# Altium PCB manually_routing_header.PcbDoc
Units mil, origin at the board's own origin, x right, y up, seen from the top; angles counter-clockwise.
Board outline 2290 x 2230 mil, 2 copper layers (Top Layer, Bottom Layer); 9 components, 28 nets, 111 pads, 18 vias.
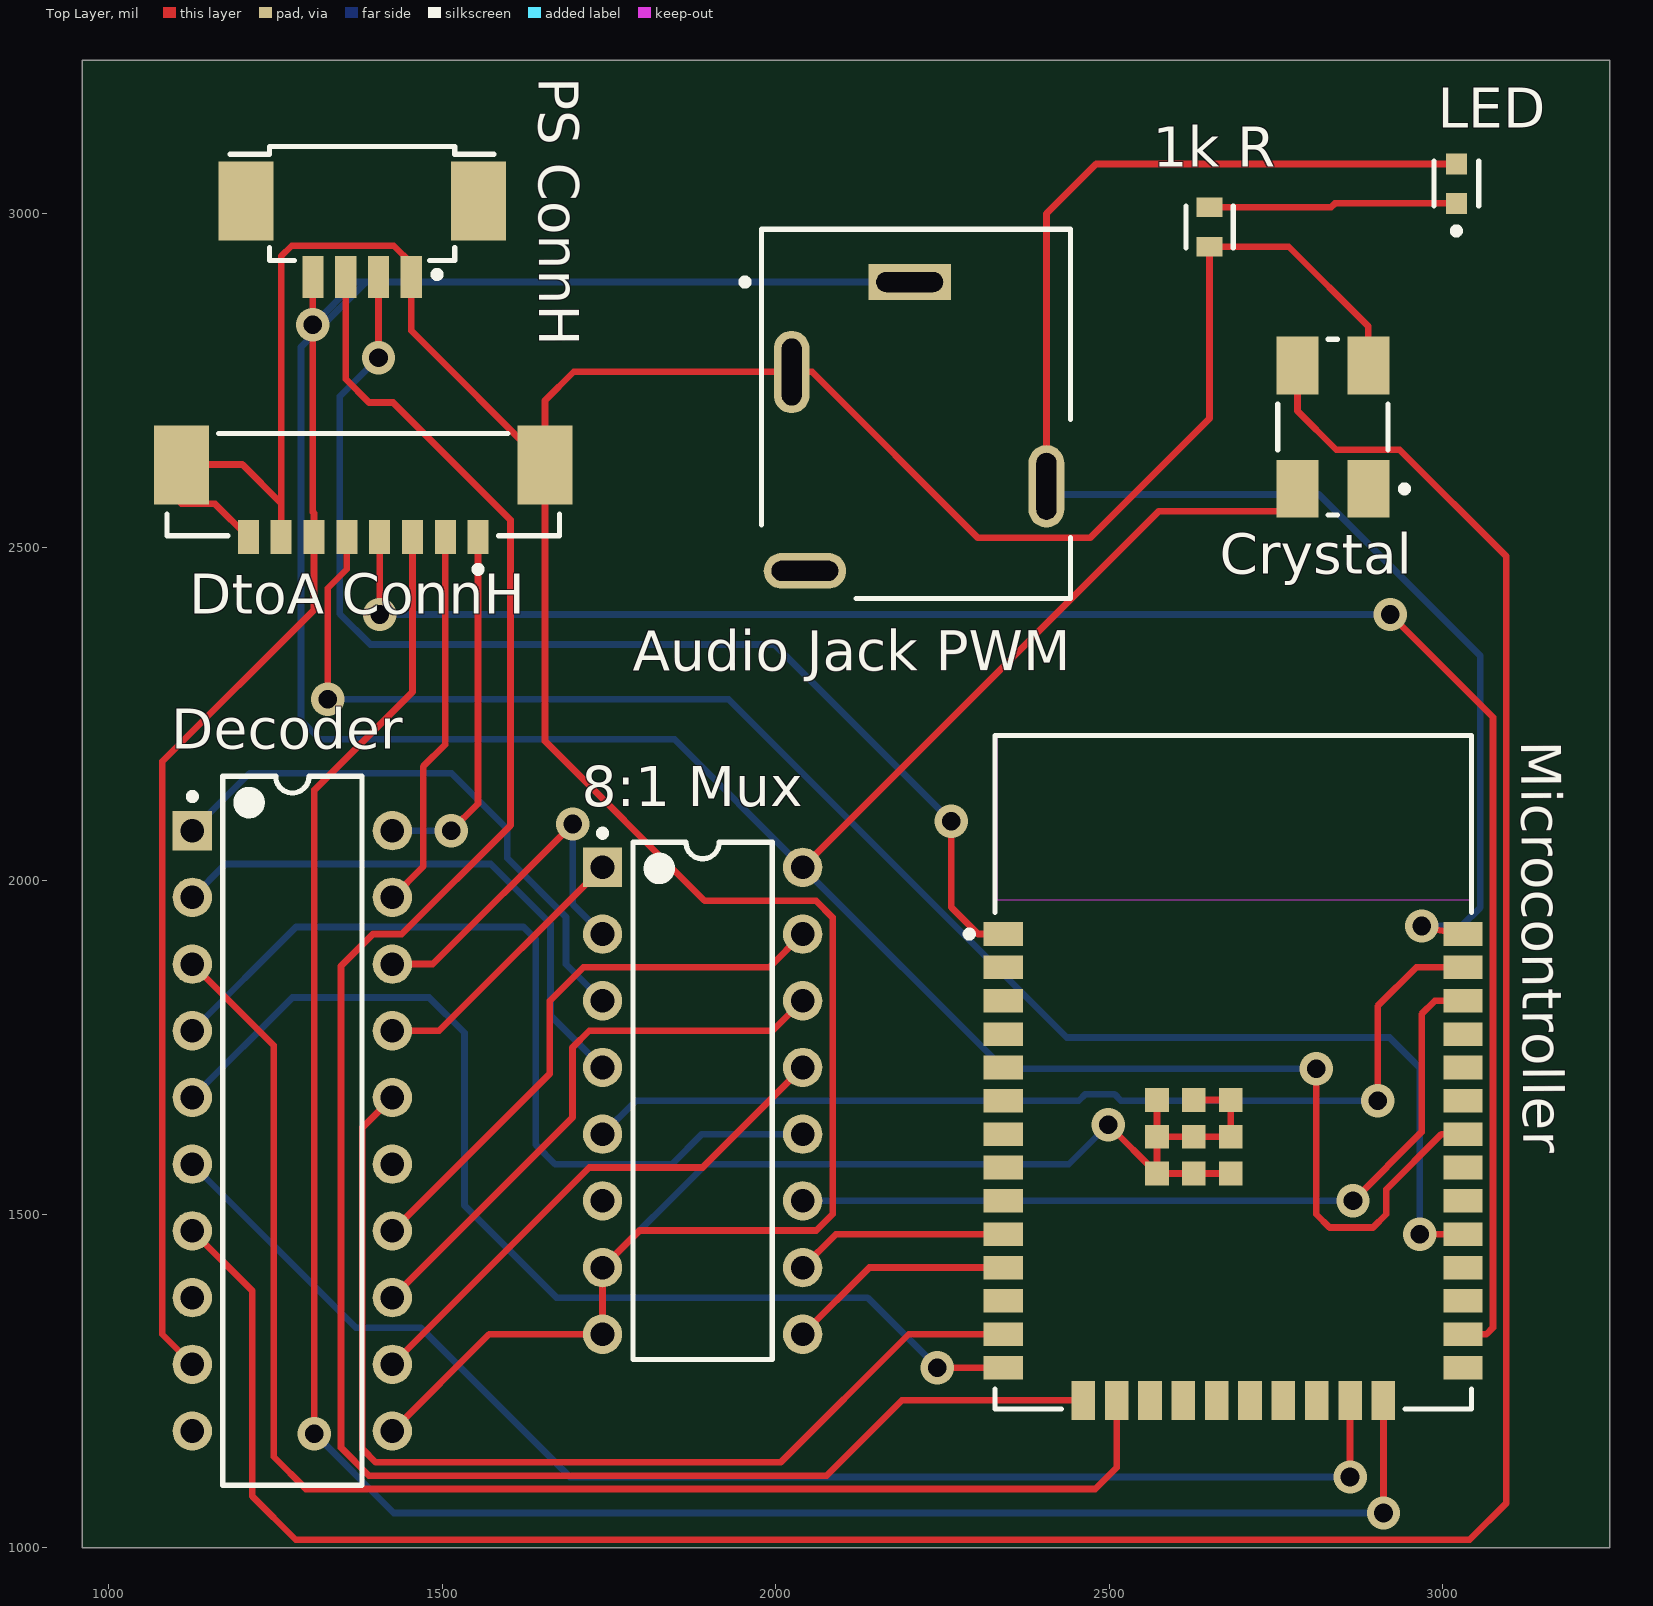
[diagram p0: Top Layer view]
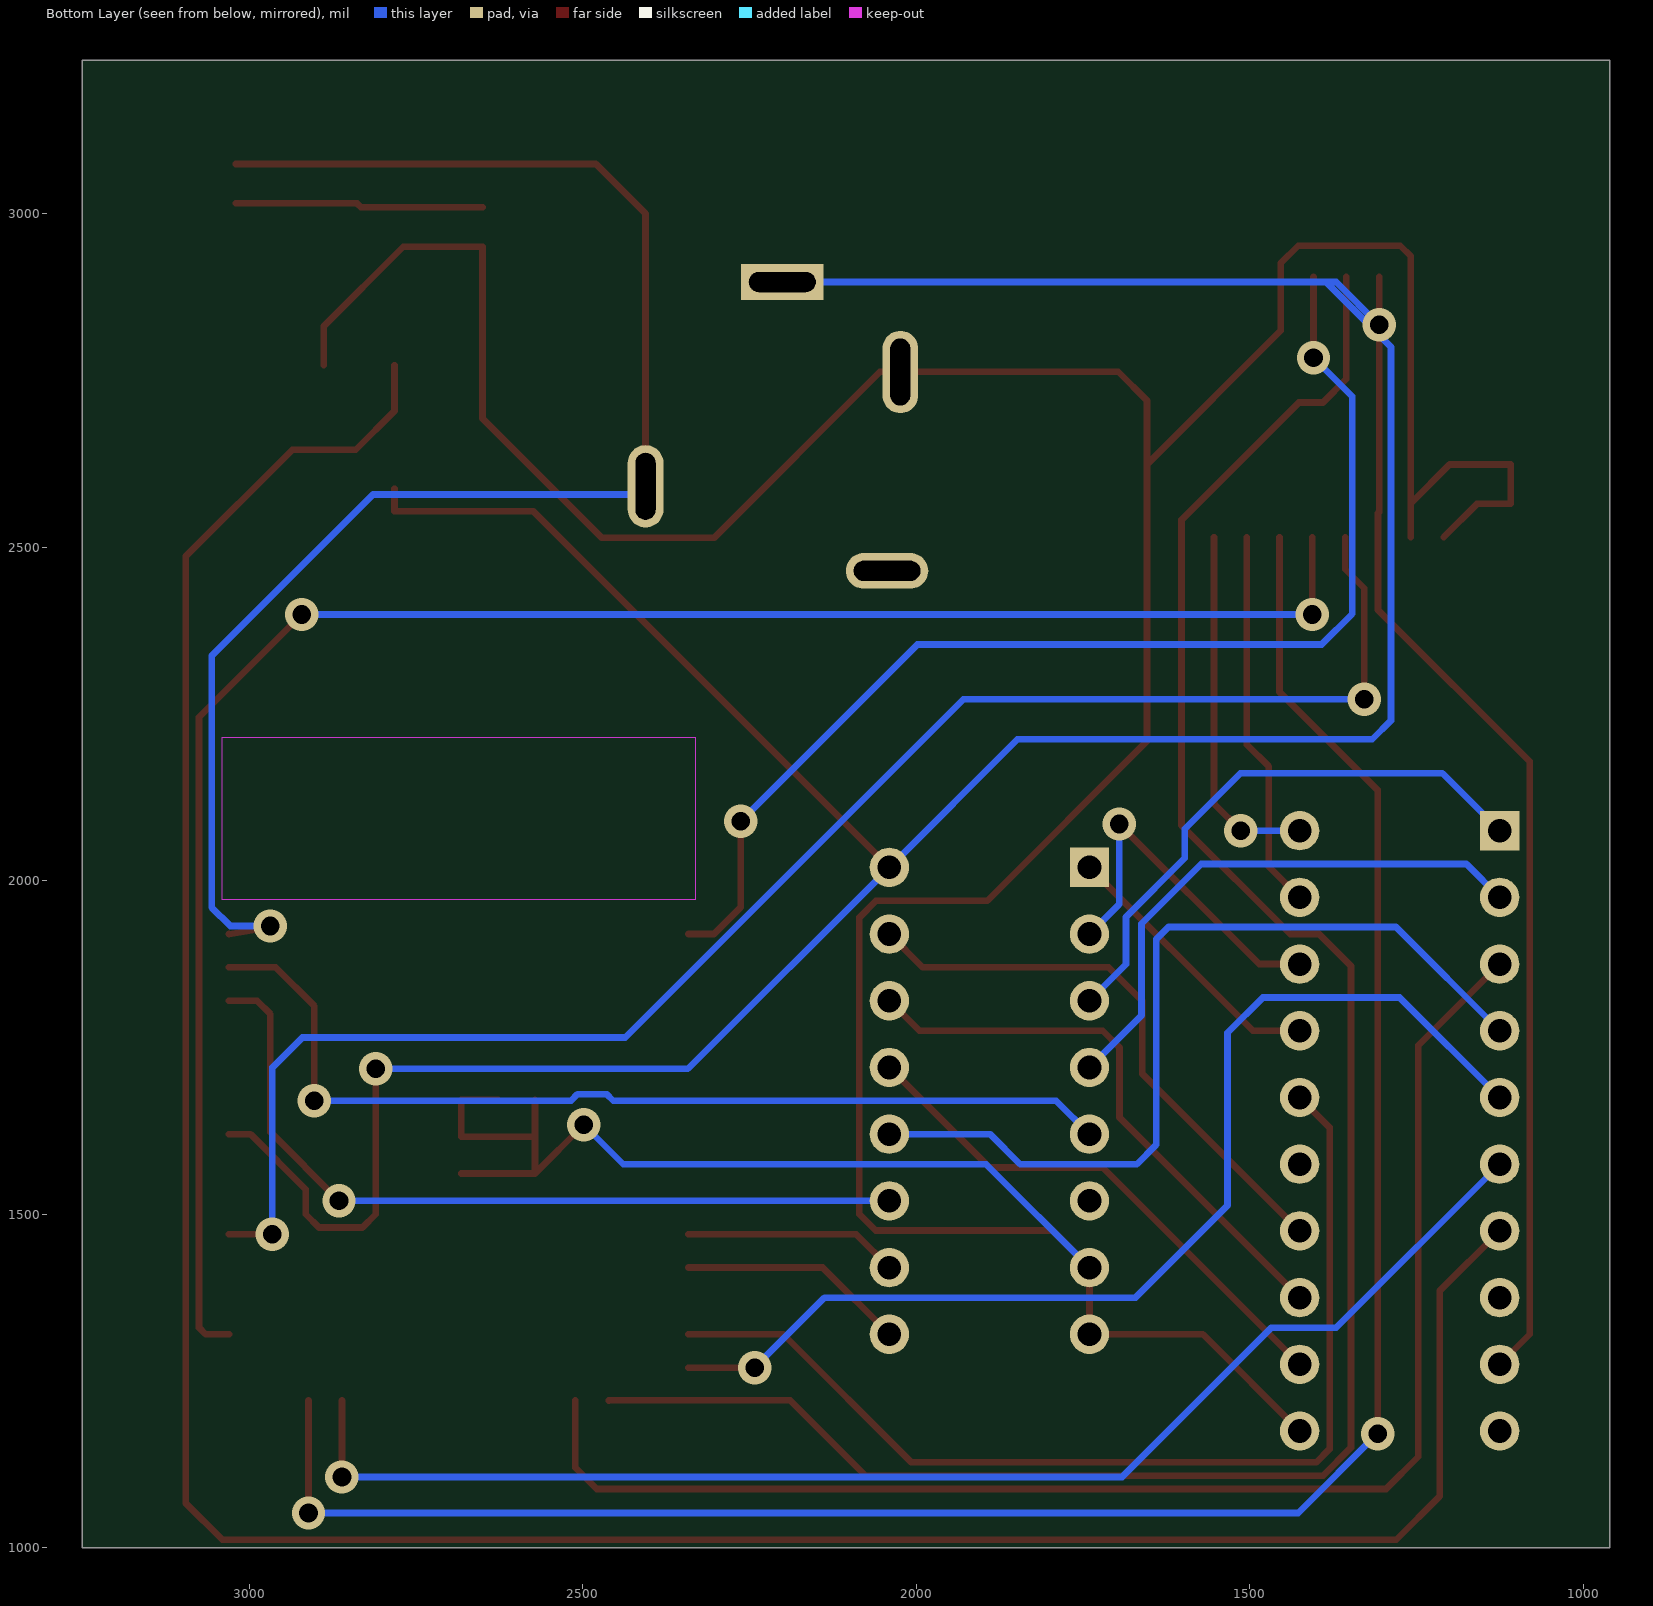
[diagram p1: Bottom Layer view, seen from below]
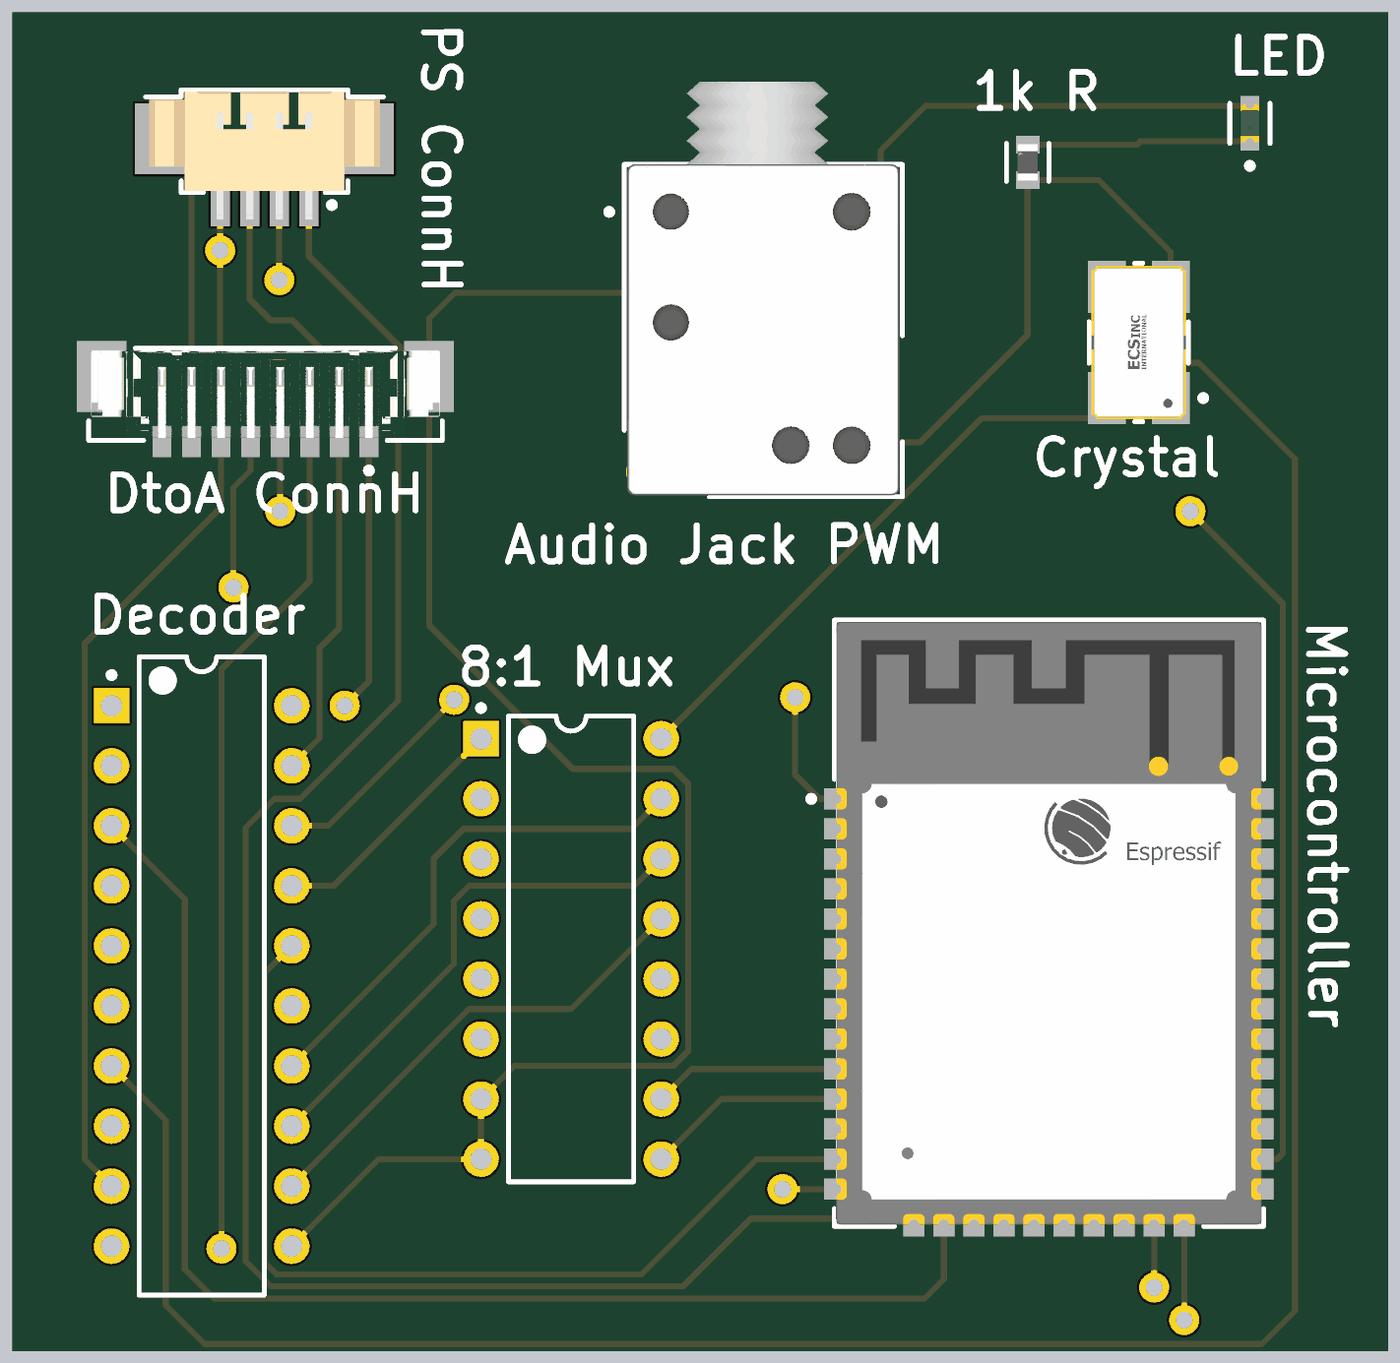
[diagram p2: 3D render of the assembled board from above, using the file's embedded part models]

## Layer stack, top to bottom
Top Solder: solder mask 0.4, Solder Resist, Dk 3.5
Top Layer: signal copper 1.4
Dielectric 1: dielectric 12.6, FR-4, Dk 4.8
Bottom Layer: signal copper 1.4
Bottom Solder: solder mask 0.4, Solder Resist, Dk 3.5

## Board outline
960,1000 3250,1000 3250,3230 960,3230

## Design rules (kind name [scope] priority, off if disabled: settings)
Clearance [All] p1: gap=10 ignorepadtopadclearanceinfootprint=FALSE except(0: Arc-Hole Track-Hole SMDPad-Hole THPad-Hole Via-Hole Fill-Hole Poly-Hole Region-Hole Text-Hole)
PolygonConnect [All] p1: connectstyle=Relief reliefconductorwidth=10 reliefentries=4 polygonreliefangle="90 Angle" airgapwidth=10
RoomDefinition pcb_schematic_digital [InComponentClass('pcb_schematic_digital')] p1: confinementstyle=ConfineIn formatcopy=TRUE lockcomponents=FALSE outline 3730,1965 9415,1965 9415,2970 3730,2970
RoutingVias [All] p1: holewidth=28 width=50 viastyle="Through Hole" minholewidth=28 minwidth=50 maxholewidth=28 maxwidth=50
SolderMaskExpansion [All] p1: expansion=4 istentingtop=FALSE
Width [All] p1: maxlimit=10 minlimit=10 preferedwidth=10
30 further rules are at their usual default settings.

## Components (designator, comment, footprint, x,y, rotation, side; value= is the part's Value field where it differs from the comment)
"1k R" "CRCW06031K00FKEA" FP-CRCW0603-e3-MFG 2650,2980 r90 top (schematic designator "1k Resistor")
"8:1 Mux" "74HC151N" N0016A 1890,1670 r0 top
"Audio Jack PWM" "35RAPC3BH3" FP-35RAPC3BH3-MFG 2210,2770 r270 top
Crystal "ECS-100AC" FP-327SMO-MFG 2835,2680 r90 top (schematic designator "20MHz Crystal")
Decoder "HCTL-2032" N0020A 1275,1625 r0 top
"DtoA ConnH" "53398-0871" FP-53398-0871-MFG 1381.18,2593.74 r0 top (schematic designator "Digital to Analog Conn Header")
LED "LTST-C190GKT" FP-LTST-C190GKT-MFG 3020,3045 r90 top
Microcontroller "ESP32-WROOM-32D" FP-ESP32-WROOM-32D_M113DH-MFG 2685.51,1712.91 r0 top
"PS ConnH" "653104131822" 653104131822 1379.61,3015.24 r180 top (schematic designator "Ultasonic Sensor Conn Header")

## Footprints (in the part's own frame and the unit in brackets; to place one, negate y for a bottom-side part, rotate by r counter-clockwise, add the part's x,y. Pads: shape width x height; smd on the part's side, far side on the other; paste and mask are expansions set on the pad)
653104131822 [mm] "1.25mm SMT Male Horizontal Shrouded Header, 4p"
  rect 0.81x1.6 smd: 1(-1.875,2.8) 2(-0.625,2.8) 3(0.625,2.8) 4(1.875,2.8)
  rect 2.1x3 smd: MP1(-4.425,-0.1) MP2(4.425,-0.1)
  silkscreen extent -5.03,-2.17 5.02,2.82, body extent -4.88,-2.1 4.88,3.3, height 3.4
FP-35RAPC3BH3-MFG [mil]
  rect 53.62x123.62 hole 100 slot 30 at 0 deg paste-39370.1 mask+0: 1(-127.5,-9.5)
  rrect100% 123.62x53.62 hole 100 slot 30 at 90 deg paste-39370.1 mask+0: 2(178.77,195.5) 5(7.37,-186.41)
  rrect100% 53.62x123.62 hole 100 slot 30 at 0 deg paste-39370.1 mask+0: 4(305.5,-166.5)
  silkscreen extent -207,-261 347,232, body extent -351,-235 351,235, height 10
FP-327SMO-MFG [mm]
  rect 2.2x1.6 smd paste+0 mask+0: 1(-2.35,-1.35) 2(2.35,-1.35) 3(2.35,1.35) 4(-2.35,1.35)
  silkscreen extent -3.35,-2.85 3.35,2.1, body extent -3.55,-2.25 3.55,2.25, height 0.25
FP-53398-0871-MFG [mm]
  rect 0.8x1.3 smd paste+0 mask+0: 1(4.375,-2) 2(3.125,-2) 3(1.875,-2) 4(0.625,-2) 5(-0.625,-2) 6(-1.875,-2) 7(-3.125,-2) 8(-4.375,-2)
  rect 2.1x3 smd paste+0 mask+0: 9(-6.925,0.75) 10(6.925,0.75)
  silkscreen extent -7.48,-3.35 7.48,1.95, body extent -8.08,-2.75 8.08,2.35, height 0.25
FP-CRCW0603-e3-MFG [mm]
  rect 0.75x1 smd paste+0 mask+0: 1(-0.75,0) 2(0.75,0)
  silkscreen extent -0.8,-0.9 0.8,0.9, body extent -1.22,-0.6 1.22,0.6, height 0.25
FP-ESP32-WROOM-32D_M113DH-MFG [mm]
  rect 1.5x0.9 smd paste+0 mask+0: 1(-8.75,5.26) 2(-8.75,3.99) 3(-8.75,2.72) 4(-8.75,1.45) 5(-8.75,0.18) 6(-8.75,-1.09) 7(-8.75,-2.36) 8(-8.75,-3.63) 9(-8.75,-4.9) 10(-8.75,-6.17) 11(-8.75,-7.44) 12(-8.75,-8.71) 13(-8.75,-9.98) 14(-8.75,-11.25) 25(8.75,-11.25) 26(8.75,-9.98) 27(8.75,-8.71) 28(8.75,-7.44) 29(8.75,-6.17) 30(8.75,-4.9) 31(8.75,-3.63) 32(8.75,-2.36) 33(8.75,-1.09) 34(8.75,0.18) 35(8.75,1.45) 36(8.75,2.72) 37(8.75,3.99) 38(8.75,5.26)
  rect 0.9x1.5 smd paste+0 mask+0: 15(-5.71,-12.5) 16(-4.44,-12.5) 17(-3.17,-12.5) 18(-1.9,-12.5) 19(-0.63,-12.5) 20(0.64,-12.5) 21(1.91,-12.5) 22(3.18,-12.5) 23(4.45,-12.5) 24(5.72,-12.5)
  rect 0.9x0.9 smd paste+0 mask+0: 39(-2.9,-3.86) 39(-2.9,-2.46) 39(-2.9,-1.06) 39(-1.5,-3.86) 39(-1.5,-2.46) 39(-1.5,-1.06) 39(-0.1,-3.86) 39(-0.1,-2.46) 39(-0.1,-1.06)
  Keep-Out Layer region: -9,6.56 9,6.56 9,12.75 -9,12.75
  Keep-Out Layer region: -9,6.56 9,6.56 9,12.75 -9,12.75
  silkscreen extent -10.17,-12.83 9.08,12.82, body extent -9.6,-13.35 9.6,12.93, height 0.25
FP-LTST-C190GKT-MFG [mm]
  rect 0.8x0.8 smd paste+0 mask+0: 1(-0.75,0) 2(0.75,0)
  silkscreen extent -1.92,-0.85 0.85,0.85, body extent -1.25,-0.55 1.25,0.55, height 0.25
N0016A [mm] "DIP, 16-Leads, Body 19.7x6.6mm, Pitch 2.54mm"
  rect 1.5x1.5 hole 0.9: 1(-3.81,8.89)
  round 1.5 hole 0.9: 2(-3.81,6.35) 3(-3.81,3.81) 4(-3.81,1.27) 5(-3.81,-1.27) 6(-3.81,-3.81) 7(-3.81,-6.35) 8(-3.81,-8.89) 9(3.81,-8.89) 10(3.81,-6.35) 11(3.81,-3.81) 12(3.81,-1.27) 13(3.81,1.27) 14(3.81,3.81) 15(3.81,6.35) 16(3.81,8.89)
  silkscreen extent -3.93,-9.85 2.65,10.31, body extent -3.95,-9.85 3.95,9.85, height 5.08
N0020A [mm] "DIP, 20-Leads, Body 26.9x6.6mm, Pitch 2.54mm"
  rect 1.5x1.5 hole 0.9: 1(-3.81,11.43)
  round 1.5 hole 0.9: 2(-3.81,8.89) 3(-3.81,6.35) 4(-3.81,3.81) 5(-3.81,1.27) 6(-3.81,-1.27) 7(-3.81,-3.81) 8(-3.81,-6.35) 9(-3.81,-8.89) 10(-3.81,-11.43) 11(3.81,-11.43) 12(3.81,-8.89) 13(3.81,-6.35) 14(3.81,-3.81) 15(3.81,-1.27) 16(3.81,1.27) 17(3.81,3.81) 18(3.81,6.35) 19(3.81,8.89) 20(3.81,11.43)
  silkscreen extent -3.93,-13.5 2.65,13.5, body extent -3.95,-13.45 3.95,13.45, height 5.08

## Part data
"1k R": library part CMP-1666-00003-5, "RES Thick Film, 1kΩ, 1%, 0.1W, 100ppm/°C, 0603", Case Code (Imperial)=0603, Case Code (Metric)=1608, Max Operating Temperature=155°C, Max Power Dissipation=100mW, Min Operating Temperature=-55°C, Package Quantity=10, Resistance=1kR, Temperature Coefficient=100ppm/°C, Tolerance=1%, Voltage Rating=75V, Case/Package=0603, Composition="Thick Film", Contact Plating=Tin, Depth=0.85mm, Features="Automotive AEC-Q200", Height=0.45mm, Lead Free="Lead Free", Length=1.55mm, Military Standard=Not, Mount="Surface Mount", Number of Pins=2, Number of Terminations=2, Packaging="Tape and Reel", Power Rating=100mW, Radiation Hardening=No, Termination=SMD/SMT, Voltage Rating (DC)=75V, Weight=7.1E-05oz, Width=0.033inch
"8:1 Mux": library part CMP-1628-00023-2, "8-Line To 1-Line Data Selectors/Multiplexers, N0016A, TUBE", F @ Nom Voltage(Max)(Mhz)=28, Generic Part Number=SN74HC151, ICC @ Nom Voltage(Max)(mA)=0.08, Manufacturer="Texas Instruments", Operating Temperature Range(C)="-40 to 85", Rating=Catalog, tpd @ Nom Voltage(Max)(ns)=63, Voltage(Nom)(V)=3.3,5, Bits(#)=8, Channels(#)=1, Code_JEDEC=MS-001, Configuration=8：1, DatasheetVersion=SCLS110E, Function=Encoder/Multiplexer, Input Type=LVTTL/CMOS, Output Drive (IOL/IOH)(Max)(mA)=7.8/-7.8, Output Type=CMOS, PackageReference=N0016A, Schmitt Trigger=No, Technology Family=HC, Type=Standard, VCC(Max)(V)=6, VCC(Min)(V)=2
"Audio Jack PWM": library part CMP-47983-000003-1, "CONN JACK STEREO 3.5MM R/A", Body Color=Black, Package Quantity=1, Voltage Rating=500V, Body Material=Brass, Color=Black, Contact Material="Copper Alloy", Contact Plating=Silver, Gender=Female, Housing Material=PBT, Lead Free="Lead Free", Mount="Through Hole", Number of Ports=1, Number of Positions=3, Number of Terminals/Pins=3, Orientation="Right Angle", Packaging=Bulk, RoHS Compliant=Yes, Series=35, Shielding=Unshielded, Termination=Solder
Crystal: library part CMP-40224-000035-1, "XTAL OSC XO 32.7680KHZ CMOS SMD", Case/Package=SMD/SMT, Frequency=32.768kHz, Frequency Stability=30ppm, Load Capacitance=15pF, Max Operating Temperature=85°C, Max Supply Current=15uA, Min Operating Temperature=-10°C, Operating Supply Voltage=3.3V, Package Quantity=1, Height=0.079inch, Lead Free="Lead Free", Length=0.256inch, Mount="Surface Mount", Packaging="Tape and Reel", RoHS Compliant=Yes, Series=ECS-327SMO, Termination=SMD/SMT, Width=0.158inch
Decoder: library part CMP-1633-00729-2, "Dual 2-Line To 4-Line Memory Decoder With On-Chip Supply Voltage Monitor, N0020A, TUBE", F @ Nom Voltage(Max)(Mhz)=70, Generic Part Number=SN74BCT2414, ICC @ Nom Voltage(Max)(mA)=3, Manufacturer="Texas Instruments", Operating Temperature Range(C)="0 to 70", Rating=Catalog, tpd @ Nom Voltage(Max)(ns)=12, Voltage(Nom)(V)=5, Bits(#)=4, Channels(#)=2, Code_JEDEC=MS-001, Configuration=2：4, DatasheetVersion=SCBS059B, Function=Decoder/Demultiplexer, Input Type=TTL, Output Drive (IOL/IOH)(Max)(mA)=20/-0.4, Output Type=TTL, PackageReference=N0020A, Schmitt Trigger=No, Technology Family=BCT, Type=Standard, VCC(Max)(V)=5.5, VCC(Min)(V)=4.5
"DtoA ConnH": library part CMP-04776-000009-1, "CONN HEADER SMD 8POS 1.25MM", Ambient Temperature Range High=+105°C, Ambient Temperature Range Low=-40°C, Current Rating=1A, Manufacturer=Molex, Package=0, Temperature="-40°C to +105°C", Voltage Rating=125V, Automotive=No, Category=Conn, ComponentLink2Description=Datasheet, ComponentLink2URL=https://www.molex.com/pdm_docs/ps/PS-51021-024-001.pdf, Conn Gender=Male, Conn Orientation=Vertical, Contact Material=Tin,Nickel, Device Class L1=Connectors, Device Class L2="Headers and Wire Housings", Device Class L3=unset, Digikey Description="CONN HEADER SMD 8POS 1.25MM", Footprint Url=https://www.molex.com/pdm_docs/sd/533980871_sd.pdf, Height=4.9mm, Lead Free=Yes, Manufacturer Part Number=53398-0871, Mouser Description="Headers & Wire Housings VERTICAL HDR SMT 8P", Number Of Contacts=8, Number Of Rows=1, Octopart=https://octopart.com/53398-0871-molex-655298, Pitch=1.25mm, RoHS=TRUE, Standoff Height=0.05mm, Temperature Range High=+105°C, Temperature Range Low=-40°C
LED: library part CMP-22017-000005-2, "LED GREEN CLEAR CHIP SMD", Case Code (Imperial)=0603, Case Code (Metric)=1608, Color=Green, Forward Current=30mA, Forward Voltage=2.1V, Lens Color=Colorless, Max Operating Temperature=85°C, Min Operating Temperature=-55°C, Package Quantity=1, Power Dissipation=100mW, Reverse Voltage=5V, Test Current=10mA, Voltage=2V, Case/Package=0603, Depth=0.8mm, Dominant Wavelength=569nm, Height=0.8mm, Illumination Color=Green, Lead Free="Lead Free", Length=1.6mm, Lens Style=Clear, Lens Transparency=Clear, Luminous Intensity=6mcd, Mount="Surface Mount", Number of Elements=1, Number of LEDs=1, Number of Pins=2, Packaging="Tape and Reel", Power Rating=100mW, Radiation Hardening=No, Viewing Angle=130°, Wavelength=565nm, Width=0.8mm
Microcontroller: library part CMP-194065-000024-1, "RX TXRX MOD WIFI TRACE ANT SMD"
"PS ConnH": library part CMP-1502-00773-1, "Male Shrouded Header WR-WTB, SMT, Right Angled, pitch 1.25 mm, 1 x 4 position", Contact Resistance=20mOhm, Manufacturer="Wurth Elektronik", Operating Temperature=-40to85degC, Working Voltage=125VAC, Datasheet URL=https://katalog.we-online.de/em/datasheet/6531xx131822.pdf, Gender=Male, Manufacturer URL=http://www.we-online.de, Mounting Technology=SMT, Orientation=RightAngled, Package Reference=653104131822, Packaging=TapeandReel, Part Number=653104131822, Pitch=1.25mm, Position=1x4, Publisher=WurthElektronik

## Via types
v1: diameter 50, hole 28, Top Layer to Bottom Layer, 18 vias

## Nets (pads, with @x,y where several pads share a name; then routed paths per layer and width w, separated by ;. In a path a pad name is that pad's centre, name@x,y a point inside that pad or via, vN(x,y) a via of type N, cw(c..) or ccw(c..) an arc to the next point about the centre after c; other vN are vias at no path point)
"Net1k Resistor_1": "1k R.1" "8:1 Mux.7" "8:1 Mux.8" "Audio Jack PWM.5" "DtoA ConnH.7" "DtoA ConnH.8" "DtoA ConnH.9" "DtoA ConnH.10" "PS ConnH.1" Crystal.2 Decoder.11 Microcontroller.39 | length 6908.5
  Top Layer w10: 1208.94,2515 1158.94,2565 1108.54,2565 1108.54,2623.27 1108.54,2624 1200,2624 1258.15,2565.85 ; 1258.15,2515 1258.15,2565.85 ; Decoder.11 1570,1320 1740,1320 1740,1420 1795.47,1475.47 2060.47,1475.47 2085,1500 2085,1945 2060,1970 1893,1970 1653.82,2209.18 1653.82,2623.27 1653.82,2624 ; 2023.59,2762.63 2023.59,2763 ; v1(2498.14,1634.14) Microcontroller.39@2571.34,1560.94 ; Microcontroller.39@2571.34,1671.18 Microcontroller.39@2571.34,1616.06 ; Microcontroller.39@2626.46,1671.18 2681.58,1671.18 2681.58,1616.06 2626.46,1616.06 Microcontroller.39@2571.34,1616.06 ; Microcontroller.39@2681.58,1560.94 2626.46,1560.94 Microcontroller.39@2571.34,1560.94 ; Crystal.2 2888.15,2831 2768.68,2950.47 2650,2950.47 2650,2693 2471,2514 2303,2514 2054,2763 2023.59,2763 ; 1258.15,2565.85 1258.15,2936.15 1274,2952 1427,2952 1453.43,2925.57 1453.43,2905 1453.43,2824.39 1653.82,2624 ; 1653.82,2624 1653.82,2720 1696.82,2763 2023.59,2763 ; Microcontroller.39@2571.34,1560.94 Microcontroller.39@2571.34,1616.06
  Bottom Layer w10: 1740,1420 1895,1575 2439,1575 v1(2498.14,1634.14)
"Net1k Resistor_2": "1k R.2" LED.1 | length 372.5
  Top Layer w10: 2650,3009.53 2832,3009.53 2837.94,3015.47 LED.1
"Net8:1 Mux_1": "8:1 Mux.1" Decoder.17 | length 416.5
  Top Layer w10: Decoder.17 1495,1775 1740,2020
"Net8:1 Mux_2": "8:1 Mux.2" Decoder.18 | length 540.9
  Top Layer w10: Decoder.18 1485.47,1875 v1(1695.47,2085)
  Bottom Layer w10: v1(1695.47,2085) 1695.47,1964.53 1740,1920
"Net8:1 Mux_3": "8:1 Mux.3" Decoder.1 | length 859.1
  Bottom Layer w10: Decoder.1 1211,2161 1513.73,2161 1597.05,2077.68 1597.05,2033.9 1685.31,1945.64 1685.31,1874.69 1740,1820
"Net8:1 Mux_4": "8:1 Mux.4" Decoder.2 | length 842.6
  Bottom Layer w10: Decoder.2 1175,2025 1572.47,2025 1662,1935.47 1662,1798 1740,1720
"Net8:1 Mux_5": "8:1 Mux.5" Microcontroller.37 | length 1485
  Top Layer w10: v1(2902,1670) 2902,1812 2960,1870 Microcontroller.37
  Bottom Layer w10: 1740,1620 1790,1670 2453.84,1670 2463.84,1680 2507.4,1680 2517.4,1670 v1(2902,1670)
"Net8:1 Mux_9": "8:1 Mux.9" Microcontroller.11 | length 342.4
  Top Layer w10: 2040,1320 2140,1420 Microcontroller.11
"Net8:1 Mux_10": "8:1 Mux.10" Microcontroller.10 | length 321.7
  Top Layer w10: 2040,1420 2090,1470 Microcontroller.10
"Net8:1 Mux_11": "8:1 Mux.11" Microcontroller.36 | length 1217.9
  Top Layer w10: v1(2865,1520) 2968,1623 2968,1800 2988,1820 Microcontroller.36
  Bottom Layer w10: 2040,1520 v1(2865,1520)
"Net8:1 Mux_12": "8:1 Mux.12" Decoder.4 | length 1325.7
  Bottom Layer w10: Decoder.4 1280.47,1930.47 1621.53,1930.47 1640,1912 1640,1604 1669,1575 1844,1575 1889,1620 2040,1620
"Net8:1 Mux_13": "8:1 Mux.13" Decoder.12 | length 799.3
  Top Layer w10: Decoder.12 1720,1570 1890,1570 2040,1720
"Net8:1 Mux_14": "8:1 Mux.14" Decoder.13 | length 860.8
  Top Layer w10: Decoder.13 1695,1645 1695,1750 1720,1775 1995,1775 2040,1820
"Net8:1 Mux_15": "8:1 Mux.15" Decoder.14 | length 863.2
  Top Layer w10: Decoder.14 1661,1711 1661,1820 1711,1870 1990,1870 2040,1920
"Net8:1 Mux_16": "8:1 Mux.16" "Audio Jack PWM.1" "DtoA ConnH.6" "PS ConnH.4" Crystal.4 Decoder.9 Microcontroller.32 | length 6623.4
  Top Layer w10: Decoder.9 1080,1320 1080,2178.59 1307.36,2405.95 1307.36,2515 1307.36,2551 1305.79,2552.58 v1(1305.79,2833.29) 1305.79,2905 ; 2040,2020 2574,2554 2781.85,2554 Crystal.4 ; v1(2810,1718) 2810,1500 2830,1480 2895,1480 2915,1500 2915,1537 2998,1620 Microcontroller.32
  Bottom Layer w10: v1(1305.79,2833.29) 1370,2897.5 1385.5,2897.5 ; 2200.5,2897.5 1385.5,2897.5 ; v1(2810,1718) 2342,1718 2040,2020 1848,2212 1316,2212 1288,2240 1288,2800 1385.5,2897.5
"Net20MHz Crystal_3": Crystal.3 Decoder.7 | length 4255.9
  Top Layer w10: Decoder.7 1215,1385 1215,1077 1280,1012 3040,1012 3095,1067 3095,2486 2935,2646 2840,2646 2781.85,2704.15 Crystal.3
"NetAudio Jack PWM_2": "Audio Jack PWM.2" LED.2 Microcontroller.38 | length 2358.5
  Top Layer w10: 2405.5,2591.23 2405.5,3000.03 2480,3074.53 LED.2 ; v1(2968,1932) 2968,1930 Microcontroller.38
  Bottom Layer w10: 2405.5,2591.23 2405.5,2579 2814,2579 3056,2337 3056,1960 3028,1932 v1(2968,1932)
NetDecoder_3: Decoder.3 Microcontroller.16 | length 2187
  Top Layer w10: Decoder.3 1247,1753 1247,1136.31 1295.31,1088 2478.71,1088 2510.71,1120 Microcontroller.16
NetDecoder_5: Decoder.5 Microcontroller.14 | length 1659.8
  Top Layer w10: v1(2242,1270) Microcontroller.14
  Bottom Layer w10: Decoder.5 1275,1825 1480,1825 1533,1772 1533,1513 1671,1375 2137,1375 v1(2242,1270)
NetDecoder_6: Decoder.6 Microcontroller.23 | length 2044.8
  Top Layer w10: v1(2860.71,1106) Microcontroller.23
  Bottom Layer w10: Decoder.6 1370,1330 1467,1330 1691,1106 v1(2860.71,1106)
NetDecoder_16: Decoder.16 Microcontroller.13 | length 1594.5
  Top Layer w10: Decoder.16 1380,1630 1380,1148 1400,1128 2007,1128 2199,1320 Microcontroller.13
NetDecoder_19: "DtoA ConnH.2" Decoder.19 | length 572.8
  Top Layer w10: Decoder.19 1471,2021 1471,2171 1504.21,2204.21 1504.21,2515
NetDecoder_20: "DtoA ConnH.1" Decoder.20 | length 544.7
  Top Layer w10: v1(1513,2075) 1553.43,2115.43 1553.43,2515
  Bottom Layer w10: Decoder.20 v1(1513,2075)
"NetDigital to Analog Conn Header_3": "DtoA ConnH.3" Microcontroller.24 | length 3225.7
  Top Layer w10: v1(1308,1171) 1308,2136 1455,2283 1455,2515 ; v1(2910.71,1052) Microcontroller.24
  Bottom Layer w10: v1(1308,1171) 1427,1052 v1(2910.71,1052)
"NetDigital to Analog Conn Header_4": "DtoA ConnH.4" Microcontroller.26 | length 2813.1
  Top Layer w10: v1(1405.79,2399) 1405.79,2515 ; v1(2921,2399) 3075,2245 3075,1330 3065,1320 Microcontroller.26
  Bottom Layer w10: v1(1405.79,2399) v1(2921,2399)
"NetDigital to Analog Conn Header_5": "DtoA ConnH.5" Microcontroller.29 | length 2435.5
  Top Layer w10: v1(1328,2272) 1328,2438.42 1356.58,2467 1356.58,2515 ; v1(2965,1470) Microcontroller.29
  Bottom Layer w10: v1(1328,2272) 1929,2272 2436,1765 2920,1765 2965,1720 v1(2965,1470)
NetMicrocontroller_1: "PS ConnH.2" Microcontroller.1 | length 1798.5
  Top Layer w10: v1(1404.21,2784) 1404.21,2905 ; v1(2263,2089) 2263,1960 2303,1920 Microcontroller.1
  Bottom Layer w10: v1(1404.21,2784) 1346,2725.79 1346,2400 1392,2354 1998,2354 v1(2263,2089)
NetMicrocontroller_15: "PS ConnH.3" Microcontroller.15 | length 3185.9
  Top Layer w10: 1355,2905 1355,2752 1390,2717 1426,2717 1602,2541 1602,2083 1439,1920 1396,1920 1348,1872 1348,1150 1390,1108 2076,1108 2189,1221 2460.71,1221 Microcontroller.15
pads on no net: "8:1 Mux.6" "Audio Jack PWM.4" "PS ConnH.MP1" "PS ConnH.MP2" Crystal.1 Decoder.8 Decoder.10 Decoder.15 Microcontroller.2 Microcontroller.3 Microcontroller.4 Microcontroller.5 Microcontroller.6 Microcontroller.7 Microcontroller.8 Microcontroller.9 Microcontroller.12 Microcontroller.17 Microcontroller.18 Microcontroller.19 Microcontroller.20 Microcontroller.21 Microcontroller.22 Microcontroller.25 Microcontroller.27 Microcontroller.28 Microcontroller.30 Microcontroller.31 Microcontroller.33 Microcontroller.34 Microcontroller.35